# EAGLE board dashbutton_rect_v1 (EAGLE 9.1.3)
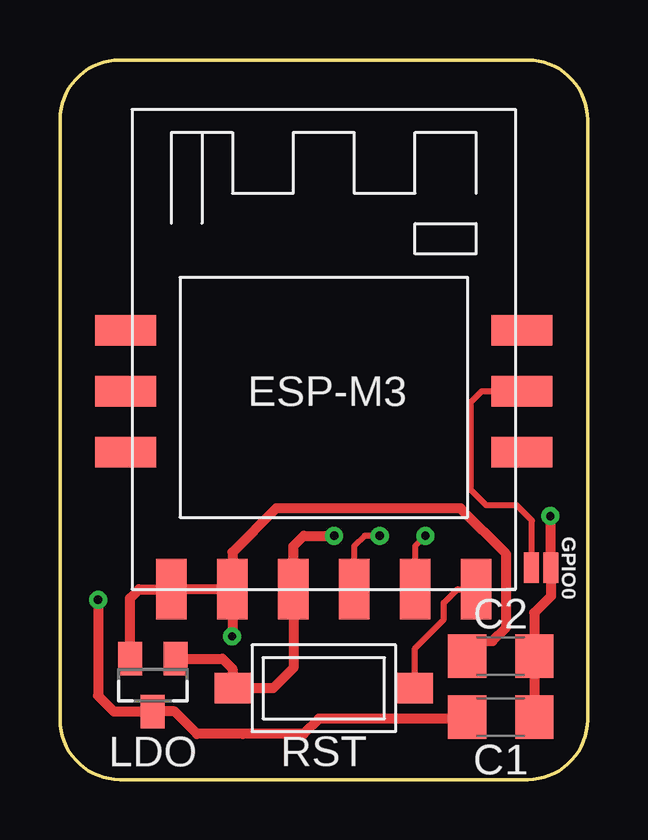
[diagram p0: board, top side]
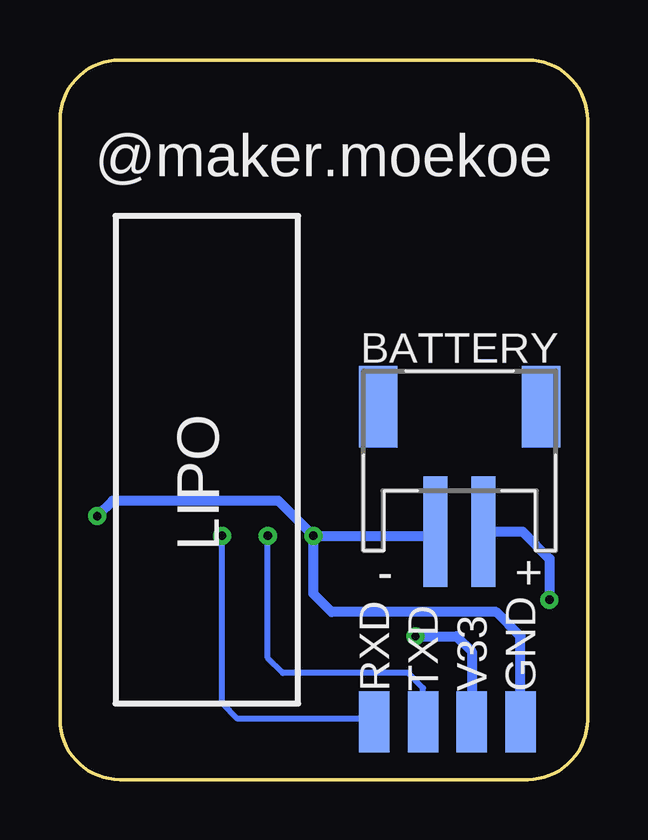
[diagram p1: board, bottom side, seen from below]

Size 22 x 30 mm. Coordinates in mm from the lower left corner, seen from the top.
Outline: 0,2.5 0,27.5 arc-90 2.5,30 19.5,30 arc-90 22,27.5 22,2.5 arc-90 19.5,0 2.5,0 arc-90 0,2.5
Copper layers (1*16): Top 0.035mm / dielectric 1.5mm / Bottom 0.035mm
Design rules "default": minimum track width 6mil, minimum drill 0.35mm, track to track 6mil, track to pad 6mil, pad to pad 6mil, via to via 6mil, smd to smd 6mil, copper to edge 40mil, drill to drill 6mil, minimum pad ring 10mil, minimum via ring 8mil, stop-mask expansion 4mil, vias tented up to drill 0mil, thermal gap 10mil

## Footprints (pad centres in the part's own frame; a part is rotated, then mirrored left to right if it is on the bottom)
JST-PH-2-SMT-RA = smd 1 x 4.6: 1 1,-3.7; 2 -1,-3.7 | smd 1.6 x 3.4: NC1 -3.4,1.5; NC2 3.4,1.5
C1206 = smd 1.6 x 1.8: 1 -1.4,0; 2 1.4,0
SMD1,27-2,54 = smd 1.27 x 2.54: 1 0,0
SMT-JUMPER_2_NO_NO-SILK = smd 0.635 x 1.27: 1 -0.406,0; 2 0.406,0
SOT23 = smd 1 x 1.4: 1 -0.95,-1.1; 2 0.95,-1.1; 3 0,1.1
6X3BUTTON = smd 1.5 x 1.27: P1 -3.81,0; P2 3.81,0
ESP8285 = smd 1.27 x 2.54: EN -6.35,0; GND -1.27,0; RST 6.35,0; RXD 3.81,0; TXD 1.27,0; VCC -3.81,0 | smd 2.54 x 1.27: GPIO0 8.255,8.255; GPIO2 8.255,5.715; GPIO4 8.255,10.795; GPIO13 -8.255,5.715; GPIO14 -8.255,8.255; GPIO16 -8.255,10.795

## Placement (x,y rotation side)
BATTERY  [JST-PH-2-SMT-RA]  5.33,14.03 0 bottom
C1  1u  [C1206]  18.38,2.6 0 top
C2  1u  [C1206]  18.38,5.14 0 top
GND  WIREPADSMD1,27-254  [SMD1,27-2,54]  2.79,2.41 0 bottom
GPIO0  [SMT-JUMPER_2_NO_NO-SILK]  20.07,8.83 0 top
LDO  MCP1700  [SOT23]  3.87,3.94 180 top
RST  6X3_SMD_BUTTON_HALF  [6X3BUTTON]  11,3.81 180 top
RXD  WIREPADSMD1,27-254  [SMD1,27-2,54]  8.89,2.41 0 bottom
TXD  WIREPADSMD1,27-254  [SMD1,27-2,54]  6.86,2.41 0 bottom
U$1  ESP8285-M3  [ESP8285]  11,7.94 0 top
V33  WIREPADSMD1,27-254  [SMD1,27-2,54]  4.83,2.41 0 bottom

## Library data of the parts
BATTERY = adafruit
C1 C2 = rcl; SPICEPREFIX: C
GND RXD TXD V33 = wirepad
GPIO0 = SparkFun-Jumpers
LDO = linear
RST U$1 = moekoe

## Nets
GND: BATTERY.2 C1.2 C2.2 GND.1 GPIO0.2 LDO.1 RST.P2 U$1.GND
GPIO0: GPIO0.1 U$1.GPIO0
RESET: RST.P1 U$1.RST
RXD: RXD.1 U$1.RXD
TXD: TXD.1 U$1.TXD
V33: C2.1 LDO.2 U$1.EN U$1.VCC V33.1
VCC: BATTERY.1 C1.1 LDO.3

## Tracks (layer width: path | path; a pad name or v marks a point on that pad's centre or on a via)
GND  (via drill 0.35)
  Top 0.406: C1.2 C2.2 19.78,6.95 20.47,7.64 GPIO0.2 20.45,8.85 v20.45,10.99 | LDO.1 6.77,5.04 7.18,4.64 | 7.18,4.64 7.19,4.62 RST.P2 8.89,3.81 9.73,4.65 U$1.GND 9.73,9.73 10.16,10.16 v11.43,10.16 | 7.18,4.64
  Bottom 0.406: v20.45,10.99 19.81,11.62 12.89,11.62 v11.43,10.16 | GND.1 2.79,5.97 3.81,6.99 10.67,6.99 11.43,7.75 v11.43,10.16 | v11.43,10.16 6.51,10.16 BATTERY.2
GPIO0
  Top 0.254: GPIO0.1 19.68,8.85 19.68,10.79 19.05,11.43 17.78,11.43 17.14,12.06 17.14,15.75 17.59,16.19 U$1.GPIO0
RESET
  Top 0.254: RST.P1 14.81,5.48 16,6.67 16,7.37 16.57,7.94 U$1.RST
RXD  (via drill 0.35)
  Top 0.254: v15.24,10.16 14.81,9.73 U$1.RXD
  Bottom 0.254: RXD.1 9.02,2.54 14.61,2.54 15.24,3.17 v15.24,10.16
TXD  (via drill 0.35)
  Top 0.254: v13.34,10.16 12.7,10.16 12.27,9.73 U$1.TXD
  Bottom 0.254: TXD.1 6.86,3.81 7.49,4.45 12.7,4.45 13.34,5.08 v13.34,10.16
V33  (via drill 0.35)
  Top 0.406: U$1.VCC U$1.EN 3.3,7.94 2.92,7.56 LDO.2 | C2.1 17.62,5.78 18.03,5.78 18.61,6.35 18.61,9.4 16.7,11.3 9.02,11.3 7.19,9.48 | 7.19,9.48 U$1.VCC | 7.19,9.48 | U$1.VCC 7.19,5.98 v7.18,5.97
  Bottom 0.406: v7.18,5.97 5.46,5.97 4.83,5.33 V33.1
VCC  (via drill 0.35)
  Top 0.406: C1.1 16.92,2.54 10.79,2.54 10.16,1.91 7.62,1.91 5.71,1.91 4.78,2.84 LDO.3 2.24,2.84 1.59,3.49 v1.59,7.49
  Bottom 0.406: BATTERY.1 2.71,10.33 1.59,9.21 v1.59,7.49

## Text on the board
bPlace: LIPO
bNames: @maker.moekoe